# EAGLE board schematic3 (EAGLE 9.0.1)
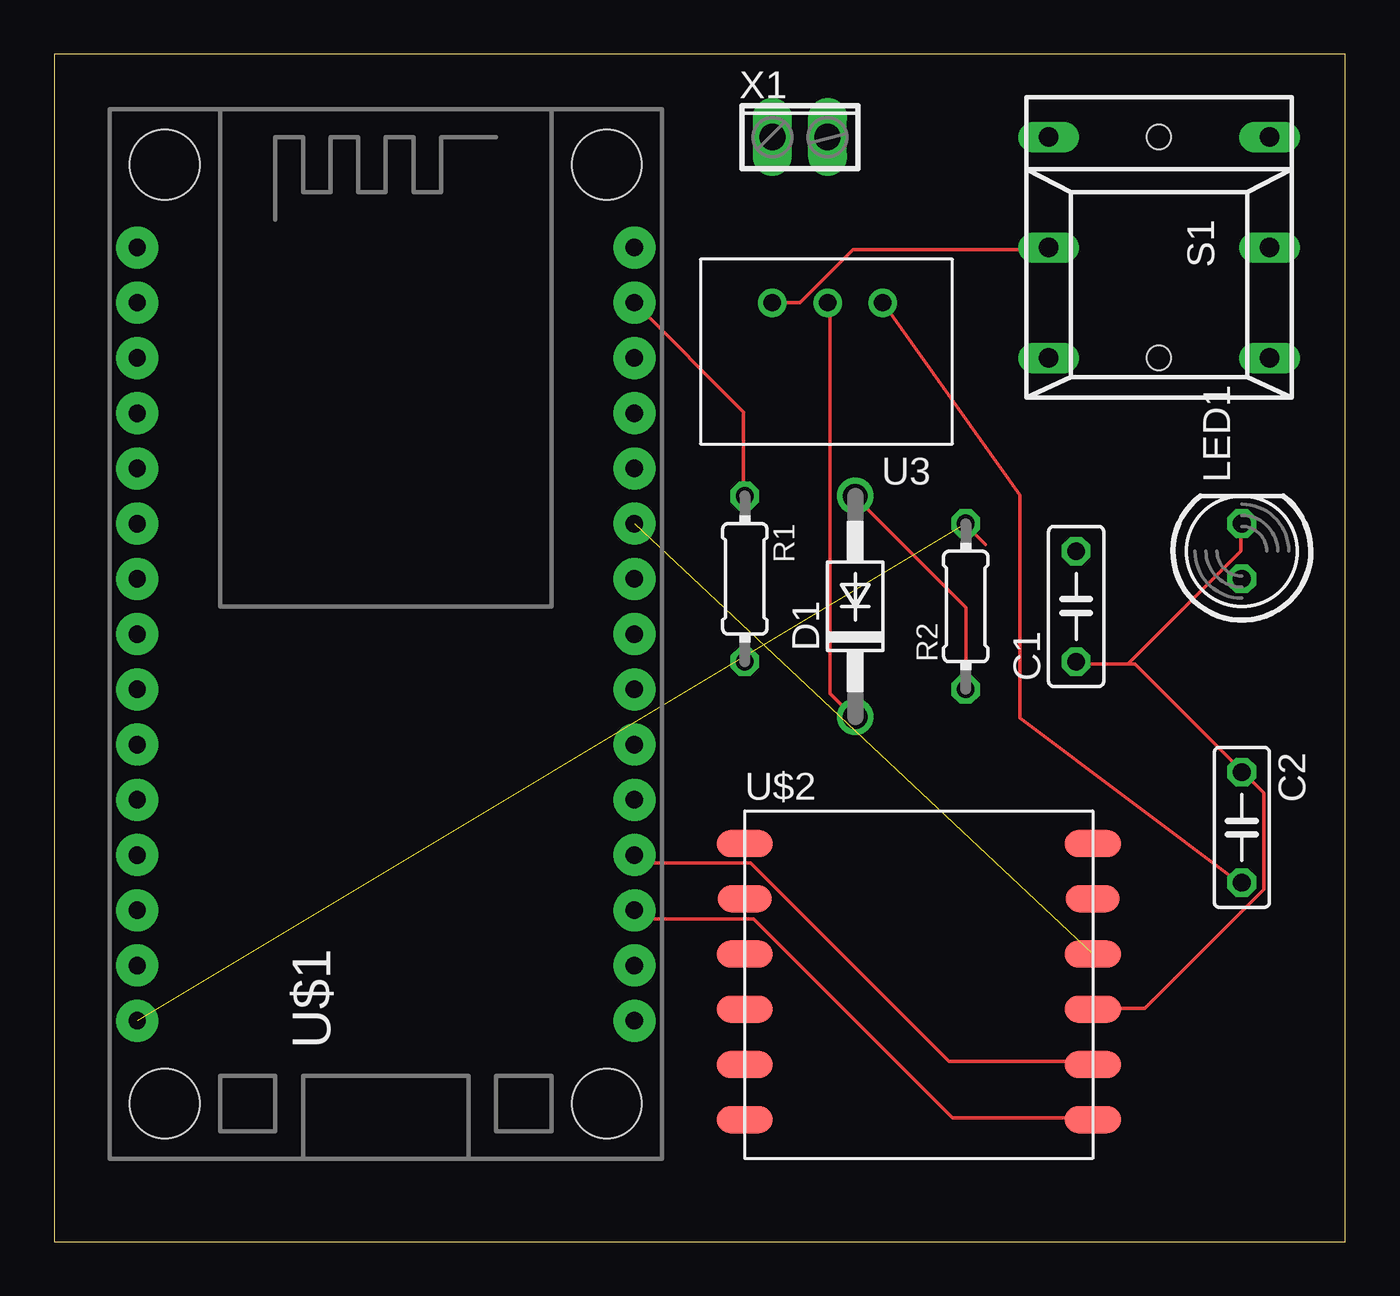
[diagram p0: board, top side]
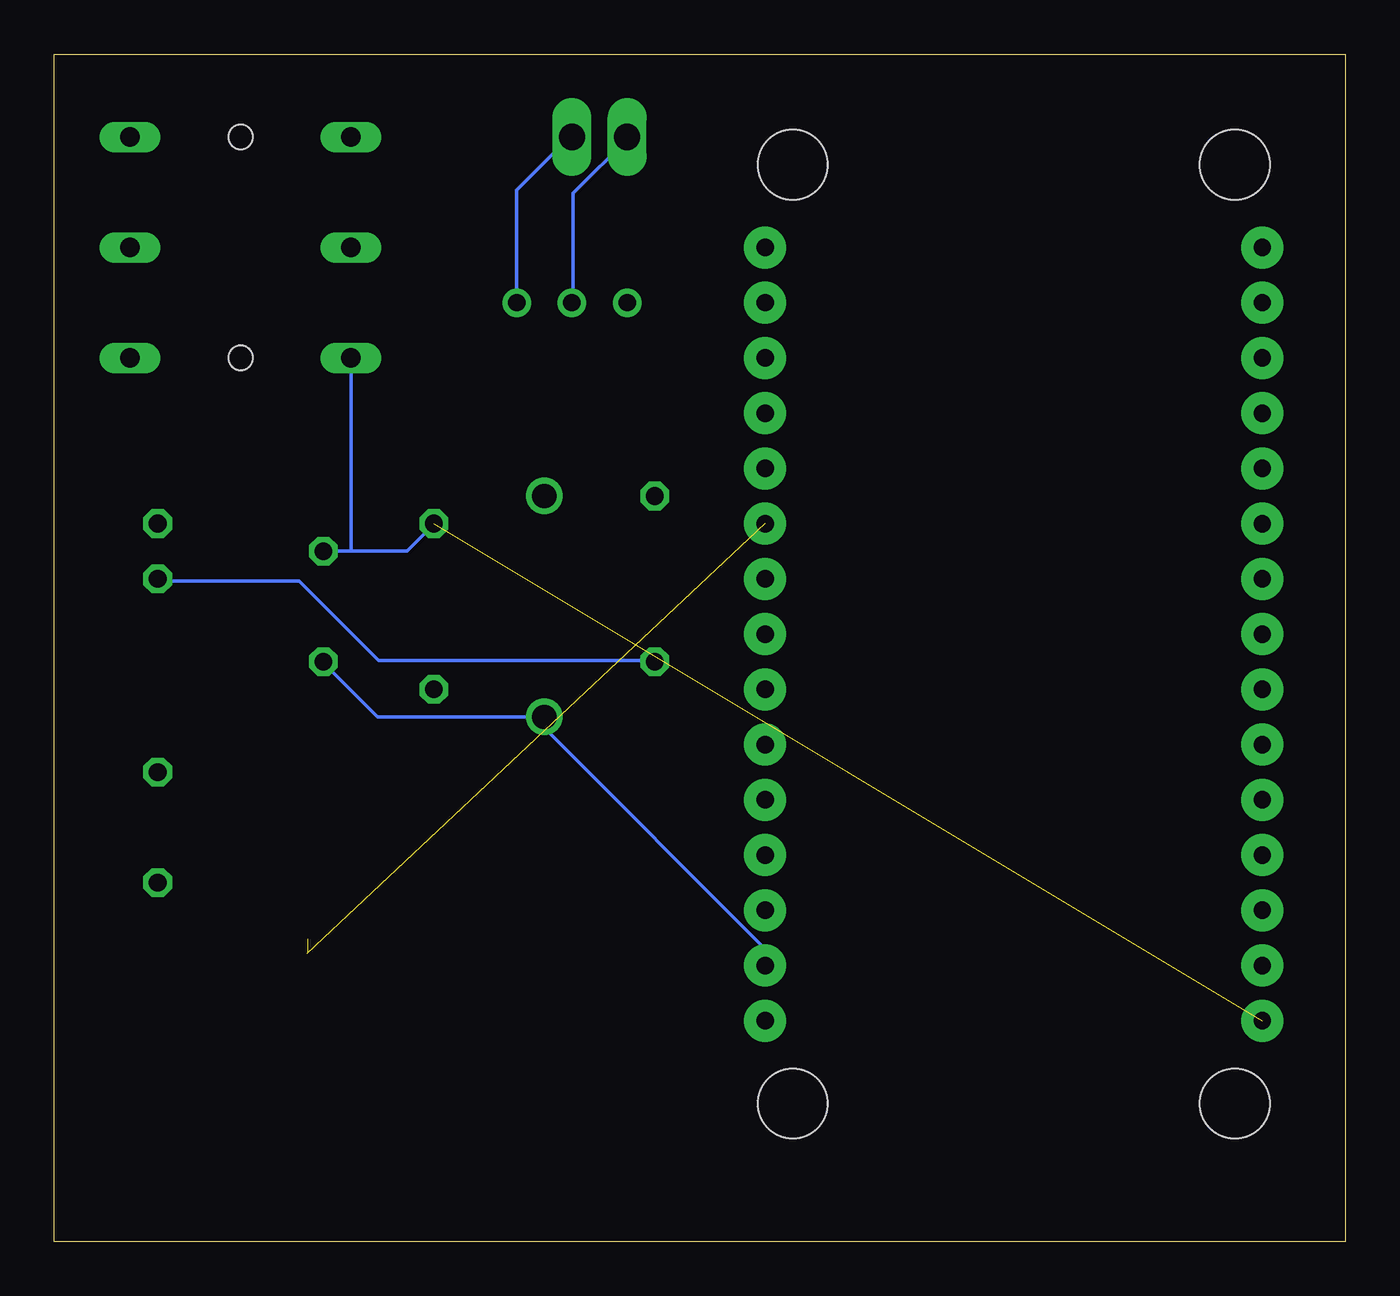
[diagram p1: board, bottom side, seen from below]

Size 59.36 x 54.6 mm. Coordinates in mm from the lower left corner, seen from the top.
Outline: 0,0 59.36,0 59.36,54.6 0,54.6 0,0
Copper layers (1*16): Top 0.035mm / dielectric 1.5mm / Bottom 0.035mm
Design rules "default": minimum track width 6mil, minimum drill 0.35mm, track to track 6mil, track to pad 6mil, pad to pad 6mil, via to via 6mil, smd to smd 6mil, copper to edge 40mil, drill to drill 6mil, minimum pad ring 10mil, minimum via ring 8mil, stop-mask expansion 4mil, vias tented up to drill 0mil, thermal gap 10mil

## Footprints (pad centres in the part's own frame; a part is rotated, then mirrored left to right if it is on the bottom)
C050-025X075 = drill 0.813 octagon: 1 -2.54,0; 2 2.54,0
DO41-10 = drill 1.118: A 5.08,0; C -5.08,0
LED5MM = drill 0.813 octagon: A -1.27,0; K 1.27,0
0204/7 = drill 0.813 octagon: 1 -3.81,0; 2 3.81,0
REKN = drill 0.9 long: 0A 5.08,5.08; 0B 5.08,-5.08; 1A 0,5.08; 1B 0,-5.08; A -5.08,5.08; B -5.08,-5.08 | hole 1.1: -5.08,0; 5.08,0
DC-DC_CONVERTER_78XX = drill 0.8: GND 0,0; VIN -2.54,0; VOUT 2.54,0
ESP12E_DEVKIT = drill 0.8 pad 1.93: 3V3@0 -11.43,-7.62; 3V3@1 11.43,5.08; 3V3@2 11.43,-17.78; AD0 -11.43,17.78; CLK -11.43,-2.54; CMD -11.43,2.54; D0 11.43,17.78; D1 11.43,15.24; D2 11.43,12.7; D3 11.43,10.16; D4 11.43,7.62; D5 11.43,0; D6 11.43,-2.54; D7 11.43,-5.08; D8 11.43,-7.62; EN -11.43,-10.16; GND@0 -11.43,-5.08; GND@1 -11.43,-15.24; GND@2 11.43,2.54; GND@3 11.43,-15.24; RST -11.43,-12.7; RSV@0 -11.43,15.24; RSV@1 -11.43,12.7; RX 11.43,-10.16; SD0 -11.43,0; SD1 -11.43,5.08; SD2 -11.43,7.62; SD3 -11.43,10.16; TX 11.43,-12.7; VIN -11.43,-17.78 | hole 3.2: -10.16,21.59; 10.16,21.59; 10.16,-21.59; -10.16,-21.59
L80_PACKAGE = smd 2.6 x 1.25: 1 16,1.8; 2 16,4.34; 3 16,6.88; 4 16,9.42; 6 16,14.5; 7 0,14.5; 9 0,9.42; 10 0,6.88; 11 0,4.34; 12 0,1.8 | smd 2.5 x 1.25: 5 16,11.96; 8 0,11.96
2POL254 = drill 1.2 long: 1 -1.27,0; 2 1.27,0

## Placement (x,y rotation side)
C1  0.00001  [C050-025X075]  46.99,29.21 90 top
C2  0.00001  [C050-025X075]  54.61,19.05 270 top
D1  1  [DO41-10]  36.83,29.21 90 top
LED1  1  [LED5MM]  54.61,31.75 90 top
R1  220  [0204/7]  31.75,30.48 270 top
R2  330  [0204/7]  41.91,29.21 90 top
S1  5  [REKN]  50.8,45.72 270 top
U3  R-78E5.0-1.0  [DC-DC_CONVERTER_78XX]  35.56,43.18 180 top
U$1  ESP12E_DEVKIT  [ESP12E_DEVKIT]  15.24,27.94 0 top
U$2  L80_GNSS_MODULE  [L80_PACKAGE]  31.75,3.81 0 top
X1  [2POL254]  34.29,50.8 0 top

## Library data of the parts
C1 C2 R1 R2 = resistor
D1 = diode
LED1 = led
S1 = switch
U3 = SparkFun-IC-Power; PROD_ID: COM-13655
U$1 = ESP12E_DEVKIT
U$2 = Quectel
X1 = con-phoenix-254; OC_FARNELL: unknown; OC_NEWARK: unknown

## Nets
GND: C1.1 C2.1 D1.C LED1.K U3.GND U$1.GND@3 U$2.3 X1.1
N$1: D1.A R2.1
N$2: C2.2 U3.VIN X1.2
N$3: S1.1B U3.VOUT
N$4: R1.1 U$1.D1
N$5: U$1.3V3@1 U$2.4
N$6: C1.2 R2.2 S1.0B U$1.VIN
N$7: LED1.A R1.2
N$9: U$1.RX U$2.2
N$10: U$1.TX U$2.1

## Tracks (layer width: path | path; a pad name or v marks a point on that pad's centre or on a via)
GND
  Top 0.152: U$2.3 47.85,10.72 50.14,10.72 55.63,16.2 55.63,20.62 54.71,21.54 C2.1 54.56,21.69 49.68,26.57 49.38,26.57 | 49.38,26.57 47.09,26.57 C1.1 | 49.38,26.57 54.56,31.75 54.56,32.97 LED1.K | U3.GND 35.66,43.18 35.66,25.2 36.73,24.13 D1.C
  Bottom 0.152: U3.GND 35.51,43.18 35.51,48.21 32.92,50.8 X1.1 | C1.1 46.94,26.57 44.5,24.13 D1.C 36.73,24.13 36.73,23.52 26.67,13.46 U$1.GND@3
N$1
  Top 0.152: R2.1 41.91,29.16 36.88,34.19 D1.A
N$2
  Top 0.152: U3.VIN 44.4,34.34 44.4,24.08 54.56,16.46 54.56,16.51 C2.2
  Bottom 0.152: U3.VIN 38.1,48.36 35.66,50.8 X1.2
N$3
  Top 0.152: U3.VOUT 34.29,43.18 36.73,45.62 45.72,45.62 S1.1B
N$4
  Top 0.152: U$1.D1 31.7,38.15 31.7,34.34 R1.1
N$5  (1 unrouted)
N$6  (1 unrouted)
  Top 0.152: 42.82,32.05 41.91,32.97 R2.2
  Bottom 0.152: 45.72,31.75 43.13,31.75 41.91,32.97 R2.2 | 45.72,31.75 C1.2 | 45.72,31.75 S1.0B
N$7
  Bottom 0.152: R1.2 31.85,26.72 44.45,26.72 48.11,30.38 54.56,30.38 LED1.A
N$9
  Top 0.152: U$2.2 47.7,8.28 41.15,8.28 32,17.42 26.98,17.42 26.67,17.73 U$1.RX
N$10
  Top 0.152: U$2.1 47.7,5.69 41.3,5.69 32.16,14.83 26.98,14.83 26.67,15.14 U$1.TX
S$1  (1 unrouted)